# Altium PCB LiOnChargerShield.PcbDoc
Units mm, origin at the board's own origin, x right, y up, seen from the top; angles counter-clockwise.
Board outline 67.87 x 33.03 mm, 2 copper layers (Top Layer, Bottom Layer); 18 components, 13 nets, 99 pads, 8 vias.
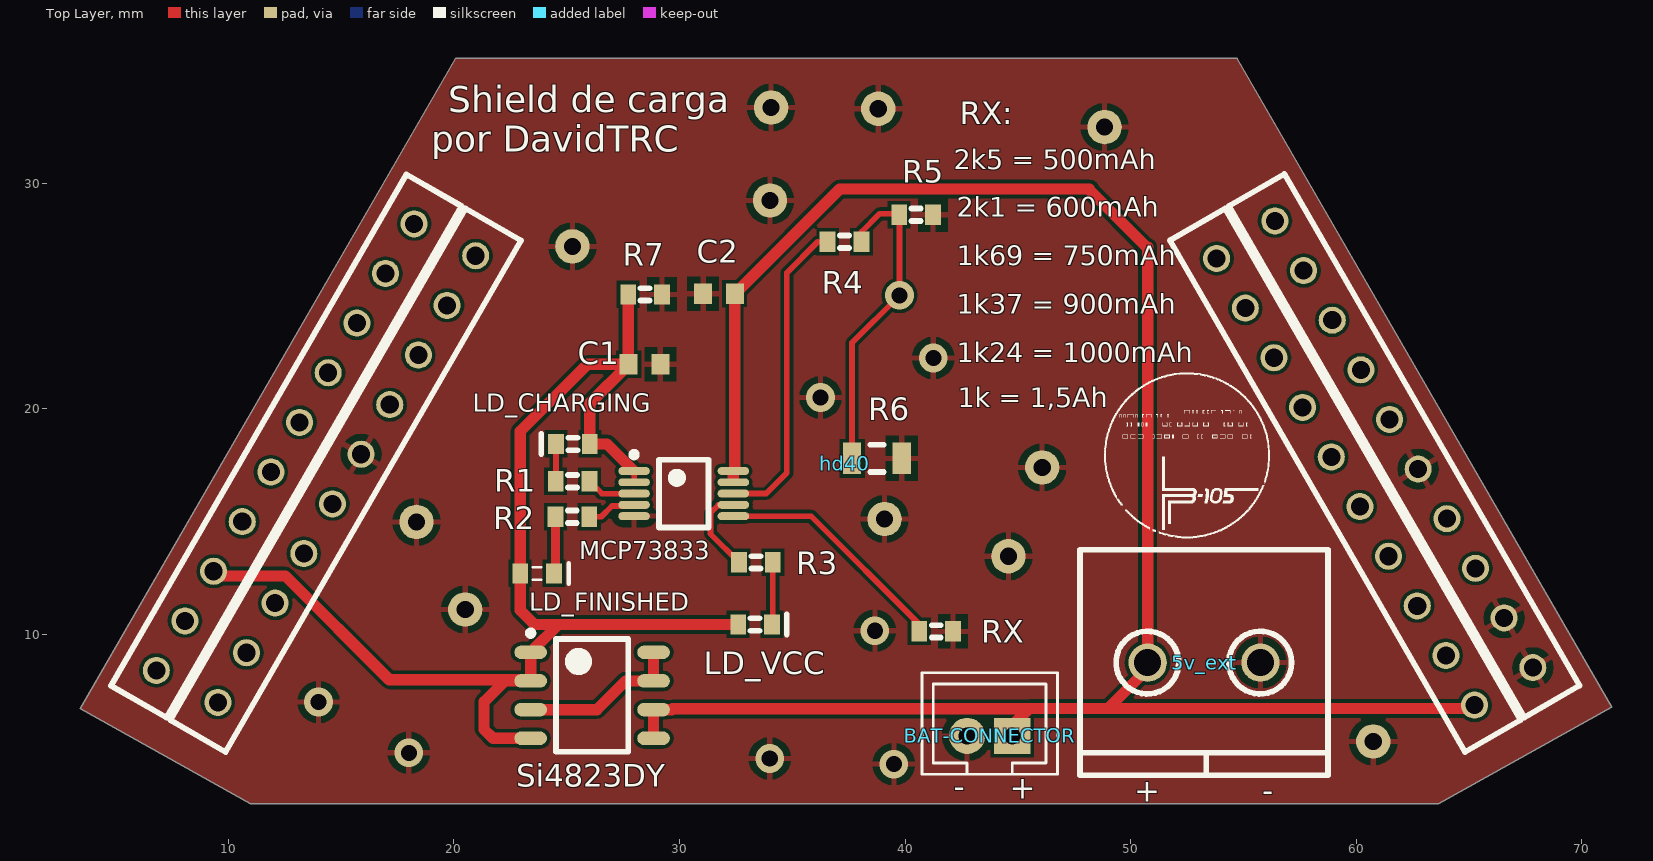
[diagram p0: Top Layer view]
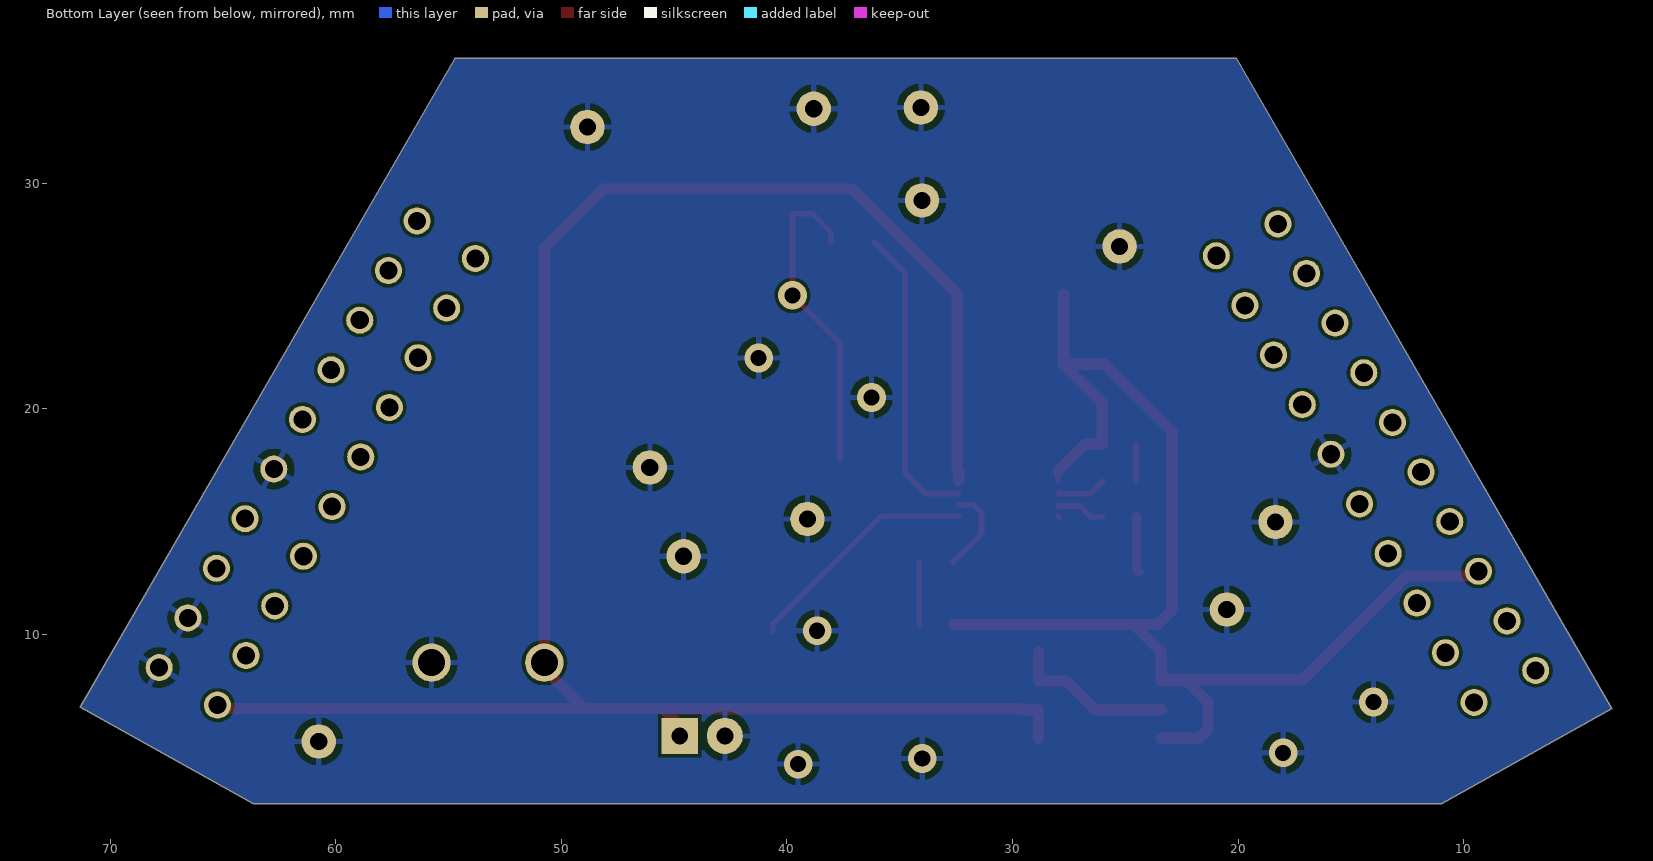
[diagram p1: Bottom Layer view, seen from below]

## Layer stack, top to bottom
Top Solder: solder mask 0.0102, Solder Resist, Dk 3.5
Top Layer: signal copper 0.0356
Dielectric 1: dielectric 0.32, FR-4, Dk 4.8
Bottom Layer: signal copper 0.0356
Bottom Solder: solder mask 0.0102, Solder Resist, Dk 3.5

## Board outline
3.444,6.706 10.98,2.5 63.651,2.5 71.315,6.777 54.713,35.53 20.073,35.53

## Design rules (kind name [scope] priority, off if disabled: settings)
Clearance [All] p1: gap=0.15
HoleSize [All] p1: absolutevalues=TRUE maxlimit=6.3 minlimit=0.3 maxpercent=80.000 minpercent=20.000
MinimumSolderMaskSliver [All] p1: minsoldermaskwidth=0.05
PolygonConnect [All] p1: connectstyle=Relief reliefconductorwidth=0.25 reliefentries=4 polygonreliefangle="90 Angle" airgapwidth=0.3
RoutingVias [All] p1: holewidth=0.3 width=0.6 viastyle="Through Hole" minholewidth=0.3 minwidth=0.6 maxholewidth=6.3 maxwidth=10.6
SilkToSilkClearance [All] p1: silktosilkclearance=0.25
SilkToSolderMaskClearance [IsPad] p1: minsilkscreentomaskgap=0.15 clearancetoexposedcopper=TRUE
SolderMaskExpansion [All] p1: expansion=0.102
UnpouredPolygon [All] p1: allowunpoured=FALSE
Width Width_Power [(InNet('GND') OR InNet('GND2') OR InNet('HD_BAT+ DIODO') OR InNet('A1 DIODO') )] p1: maxlimit=0.5 minlimit=0.25 preferedwidth=0.5
Width [All] p2: maxlimit=10 minlimit=0.15 preferedwidth=0.25
25 further rules are at their usual default settings.

## Components (designator, comment, footprint, x,y, rotation, side; value= is the part's Value field where it differs from the comment)
5v_ext "Conector ED-1631" "Conector ED-1631" 58.25,3.25 r180 top
BAT-CONNECTOR "Header-1x2" B2B-PH-K-S 43.75,5.5 r180 top
C1 "Cap" "0603 Cap" 28.448,21.971 r0 top
C2 "Cap" "0603 Cap" 31.75,25.1 r180 top
hd40 "header" header_cognitiveNGD 22.063,15.58 r0 top locked
LD_CHARGING "LED" "0603 LED-Green" 25.273,18.44 r180 top
LD_FINISHED "LED" "0603 LED-BLUE" 23.686,12.7 r0 top
LD_VCC "LED" "0603 LED-RED" 33.35,10.439 r0 top
MCP73833 "Stand-Alone Linear Li-Ion / Li-Polymer Charge  Management Controller" MCP73833/4 30.186,16.241 r0 top
R1 "Res" "0603 Res" 25.26,16.789 r0 top
R2 "221" "0603 Res" 25.248,15.215 r0 top
R3 "Res" "0603 Res" 33.386,13.193 r0 top
R4 "Res" "0603 Res" 37.313,27.407 r0 top
R5 "Res" "0603 Res" 40.488,28.6 r0 top
R6 "Res" "0805 Res" 38.75,17.8 r0 top
R7 "Res" "0603 Res" 28.473,25.07 r0 top
RX "Res" "0603 Res" 41.377,10.135 r0 top
Si4823DY "Si4823DY" Si4823DY 26.125,7.3 r0 top

## Footprints (in the part's own frame and the unit in brackets; to place one, negate y for a bottom-side part, rotate by r counter-clockwise, add the part's x,y. Pads: shape width x height; smd on the part's side, far side on the other; paste and mask are expansions set on the pad)
"0603 Cap" [mm] "Chip Capacitor, Body 1.6x0.8mm, IPC High Density"
  rect 0.8x0.9 smd: 1(-0.7,0) 2(0.7,0)
  body extent -0.8,-0.4 0.8,0.4, height 0.78
"0603 LED-BLUE" [mm] "LED, Body 1.6x0.8mm, IPC High Density"
  rect 0.7x0.9 smd: 1(-0.75,0) 2(0.75,0)
  silkscreen extent -0.2,-0.45 1.4,0.45, body extent -0.85,-0.45 0.85,0.45, height 0.9
"0603 LED-Green" [mm] "LED, Body 1.6x0.8mm, IPC High Density"
  rect 0.7x0.9 smd: 1(-0.75,0) 2(0.75,0)
  silkscreen extent -0.2,-0.45 1.4,0.45, body extent -0.85,-0.45 0.85,0.45, height 0.9
"0603 LED-RED" [mm] "LED, Body 1.6x0.8mm, IPC High Density"
  rect 0.7x0.9 smd: 1(-0.75,0) 2(0.75,0)
  silkscreen extent -0.2,-0.45 1.4,0.45, body extent -0.85,-0.45 0.85,0.45, height 0.9
"0603 Res" [mm] "Chip Resistor, Body 1.6x0.8mm, IPC High Density"
  rect 0.7x0.9 smd: 1(-0.75,0) 2(0.75,0)
  silkscreen extent -0.2,-0.28 0.2,0.28, body extent -0.78,-0.43 0.78,0.43, height 0.44
"0805 Res" [mm] "Chip Capacitor, 2-Leads, Body 2,0x1,3mm, IPC Medium Density"
  rect 0.8x1.4 smd: 1(-1.1,0) 2(1.1,0)
  silkscreen extent -0.3,-0.6 0.3,0.6, body extent -1,-0.62 1,0.62, height 0.44
B2B-PH-K-S [mm] "PH Connector 2mm pitch, top entry"
  rect 1.6x1.6 hole 0.75: 1(-1,0)
  round 1.6 hole 0.75: 2(1,0)
  silkscreen extent -3,-2.8 3,1.7, body extent -2.95,-2.8 2.95,1.7, height 6
"Conector ED-1631" [mm]
  round 1.7 hole 1.2: 1(2.5,-5.5) 2(7.5,-5.5)
  silkscreen extent -0.5,-10.5 10.5,-0.5, body extent -0.02,-10.1 9.98,-2.1, height 10
header_cognitiveNGD [mm]
  round 1.2 / inner oval 2.5x1.2 / far side round 1.2 hole 0.8: 00(-3.826,12.617) 01(-5.096,10.417) 02(-6.366,8.217) 03(-7.636,6.018) 04(-8.906,3.818) 05(-10.176,1.618) 06(-11.446,-0.581) 07(-12.716,-2.781) 08(-13.986,-4.981) 09(-15.256,-7.181) 10(-12.527,-8.594) 11(-11.257,-6.395) 12(-9.987,-4.195) 13(-8.717,-1.995) 14(-7.447,0.204) 15(-6.177,2.404) 16(-4.907,4.604) 17(-3.637,6.804) 18(-2.367,9.003) 19(-1.097,11.203) 20(31.747,11.082) 21(33.017,8.882) 22(34.287,6.682) 23(35.557,4.483) 24(36.827,2.283) 25(38.097,0.083) 26(39.367,-2.116) 27(40.637,-4.316) 28(41.907,-6.516) 29(43.177,-8.716) 30(45.761,-7.051) 31(44.491,-4.851) 32(43.221,-2.651) 33(41.951,-0.452) 34(40.681,1.748) 35(39.411,3.948) 36(38.141,6.148) 37(36.871,8.347) 38(35.601,10.547) 39(34.331,12.747)
  silkscreen extent -17.26,-10.79 47.84,14.82, body extent -16.97,-10.43 47.5,14.46, height 7
MCP73833/4 [mm] "Stand-Alone Linear Li-Ion / Li-Polymer Charge  Management Controller"
  oval 1.4x0.35 smd mask+0.05: 1(-2.2,1) 2(-2.2,0.5) 3(-2.2,0) 4(-2.2,-0.5) 5(-2.2,-1) 6(2.2,-1) 7(2.2,-0.5) 8(2.2,0) 9(2.2,0.5) 10(2.2,1)
  silkscreen extent -2.32,-1.5 1.1,1.85, body extent -1.5,-1.5 1.5,1.5, height 1.1
Si4823DY [mm] "P-Channel 20 V (D-S) MOSFET with Schottky Diode"
  oval 1.45x0.6 smd mask+0.05: 1(-2.725,1.905) 2(-2.725,0.635) 3(-2.725,-0.635) 4(-2.725,-1.905) 5(2.725,-1.905) 6(2.725,-0.635) 7(2.725,0.635) 8(2.725,1.905)
  silkscreen extent -2.85,-2.5 1.6,2.88, body extent -2,-2.5 2,2.5, height 1.75

## Part data
5v_ext: "Terminal Block 2 vías, 5mm"
hd40: library part header_cognitiveNGD
MCP73833: library part MCP73833
R2: library part Res

## Free pads (board coordinates)
  round 1.524 hole 0.762: 0(46.076,17.399) 0(48.844,32.487) 1(20.5,11.1) 1(34.061,33.35) 2(25.25,27.2) 2(38.811,33.299) 2(60.75,5.25) 3(18.339,14.986) 3(44.577,13.462) 4(39.091,15.113) 5(34.011,29.235)

## Via types
v1: diameter 1.27, hole 0.711, Top Layer to Bottom Layer, 8 vias

## Nets (pads, with @x,y where several pads share a name; then routed paths per layer and width w, separated by ;. In a path a pad name is that pad's centre, name@x,y a point inside that pad or via, vN(x,y) a via of type N, cw(c..) or ccw(c..) an arc to the next point about the centre after c; other vN are vias at no path point)
GND: 5v_ext.1 BAT-CONNECTOR.2 C1.2 C2.2 hd40.15 hd40.30 hd40.31 hd40.34 MCP73833.5 pad.0 pad.1 pad.2 pad.3 pad.4 pad.5 R5.2 R6.2 R7.2 RX.2 | length 0.1
  Top Layer w0.254: MCP73833.5@27.949,15.204 MCP73833.5
  other v1: 39.5,4.25 34,4.5 18,4.75 14,7 38.659,10.16 36.25,20.5 41.25,22.25
Net5v_ext_2: 5v_ext.2 BAT-CONNECTOR.1 C2.1 hd40.29 MCP73833.9 MCP73833.10 Si4823DY.5 Si4823DY.6 | length 90.1
  Top Layer w0.254: MCP73833.9 MCP73833.9@32.386,16.816
  Top Layer w0.5: Si4823DY.5 Si4823DY.6 29.658,6.665 29.693,6.7 45.484,6.7 ; MCP73833.9@32.386,16.816 MCP73833.10 32.45,17.305 C2.1 32.459,25.1 37.103,29.743 48.176,29.743 ; BAT-CONNECTOR.1 44.75,5.966 45.484,6.7 ; 48.15,29.718 50.725,27.144 ; 50.75,27.169 5v_ext.2 50.75,8.466 49,6.716 ; hd40.29 65.092,6.716 49,6.716 ; 45.484,6.7 45.5,6.716 49,6.716
NetC1_1: C1.1 hd40.07 LD_CHARGING.1 LD_FINISHED.1 LD_VCC.1 MCP73833.1 MCP73833.2 R7.1 Si4823DY.1 Si4823DY.2 Si4823DY.4 | length 59.2
  Top Layer w0.25: MCP73833.2@27.986,16.816 MCP73833.1
  Top Layer w0.5: hd40.07 9.347,12.585 12.536,12.585 17.134,7.986 Si4823DY.2@23.4,7.986 ; Si4823DY.4 21.731,5.395 21.336,5.791 21.336,7.01 22.261,7.935 Si4823DY.2 Si4823DY.2@23.4,7.986 ; R7.1 27.723,21.996 C1.1 ; MCP73833.1 26.787,18.44 LD_CHARGING.1 26.023,20.246 C1.1 ; LD_VCC.1 24.634,10.439 ; Si4823DY.2@23.4,7.986 Si4823DY.1 24.634,10.439 ; 24.634,10.439 23.571,10.439 22.936,11.074 LD_FINISHED.1 22.936,18.999 25.908,21.971 C1.1
NetLD_CHARGING_2: LD_CHARGING.2 R1.1 | length 1.7
  Top Layer w0.254: R1.1 24.523,16.803 LD_CHARGING.2
NetLD_FINISHED_2: LD_FINISHED.2 R2.1 | length 2.5
  Top Layer w0.4: LD_FINISHED.2@24.397,12.751 24.498,12.851 R2.1
NetLD_VCC_2: LD_VCC.2 R3.2 | length 2.8
  Top Layer w0.254: LD_VCC.2 34.136,10.476 R3.2
NetMCP73833_3: MCP73833.3 R1.2 | length 2.3
  Top Layer w0.25: R1.2 26.558,16.241 MCP73833.3 MCP73833.3@27.936,16.291
NetMCP73833_4: MCP73833.4 R2.2 | length 2.2
  Top Layer w0.254: R2.2 26.53,15.215 27.009,15.693 27.938,15.693 MCP73833.4
NetMCP73833_6: MCP73833.6 RX.1 | length 10.5
  Top Layer w0.254: MCP73833.6 35.834,15.241 40.627,10.448 RX.1
NetMCP73833_7: MCP73833.7 R3.1 | length 3.9
  Top Layer w0.254: MCP73833.7 31.722,15.741 31.375,15.395 31.375,14.455 R3.1
NetMCP73833_8: MCP73833.8 R4.1 | length 13.6
  Top Layer w0.254: MCP73833.8 33.841,16.241 34.75,17.15 34.75,26.025 36.125,27.4
NetR4_2: R4.2 R5.1 R6.1 | length 14.2
  Top Layer w0.25: R4.2 38.063,27.838 38.875,28.65
  Top Layer w0.254: R6.1 37.65,22.925 v1(39.75,25.025) 39.75,28.65 38.875,28.65
NetSi4823DY_3: Si4823DY.3 Si4823DY.7 Si4823DY.8 | length 7.2
  Top Layer w0.5: Si4823DY.3 26.34,6.665 27.61,7.935 Si4823DY.7 Si4823DY.8
pads on no net: hd40.00 hd40.01 hd40.02 hd40.03 hd40.04 hd40.05 hd40.06 hd40.08 hd40.09 hd40.10 hd40.11 hd40.12 hd40.13 hd40.14 hd40.16 hd40.17 hd40.18 hd40.19 hd40.20 hd40.21 hd40.22 hd40.23 hd40.24 hd40.25 hd40.26 hd40.27 hd40.28 hd40.32 hd40.33 hd40.35 hd40.36 hd40.37 hd40.38 hd40.39

## Polygon pours and split planes (outlines as drawn)
GND on Bottom Layer "GND" (solid, remove dead copper, pour order 4): 3.444,6.706 10.98,2.5 63.651,2.5 71.315,6.777 54.713,35.53 20.073,35.53
GND on Top Layer "GND_UP" (solid, pour order 3): 20.073,35.53 54.713,35.53 71.315,6.777 63.651,2.5 10.98,2.5 3.444,6.706 20.073,35.53

## Silkscreen, mask and mechanical layers (free items; w line width, h text height)
Top Overlay:
  drawing of 62 lines, arcs and shapes, not listed
  text "Shield de carga" at 19.75,32.75 h2
  text "RX:" at 42.416,32.622 h1
  text "por DavidTRC" at 19,31 h2
  text "2k5 = 500mAh" at 42.166,30.322 h1.5
  text "2k1 = 600mAh" at 42.291,28.222 h1.5
  text "1k69 = 750mAh" at 42.291,26.072 h1.5
  text "1k37 = 900mAh" at 42.291,23.922 h1.5
  text "1k24 = 1000mAh" at 42.291,21.772 h1.5
  text "1k = 1,5Ah" at 42.342,19.787 h1.5
  text "-" at 42.164,2.769 h1
  text "+" at 44.628,2.718 h1
  text "+" at 50.165,2.591 h1
  text "-" at 55.829,2.591 h1
Mechanical 1:
  the board outline again, w0.25